# Altium PCB LED strip driver V3.PcbDoc
Units mm, origin at the board's own origin, x right, y up, seen from the top; angles counter-clockwise.
Board outline 41.35 x 36.82 mm, 2 copper layers (Top Layer, Bottom Layer); 45 components, 41 nets, 142 pads, 19 vias.
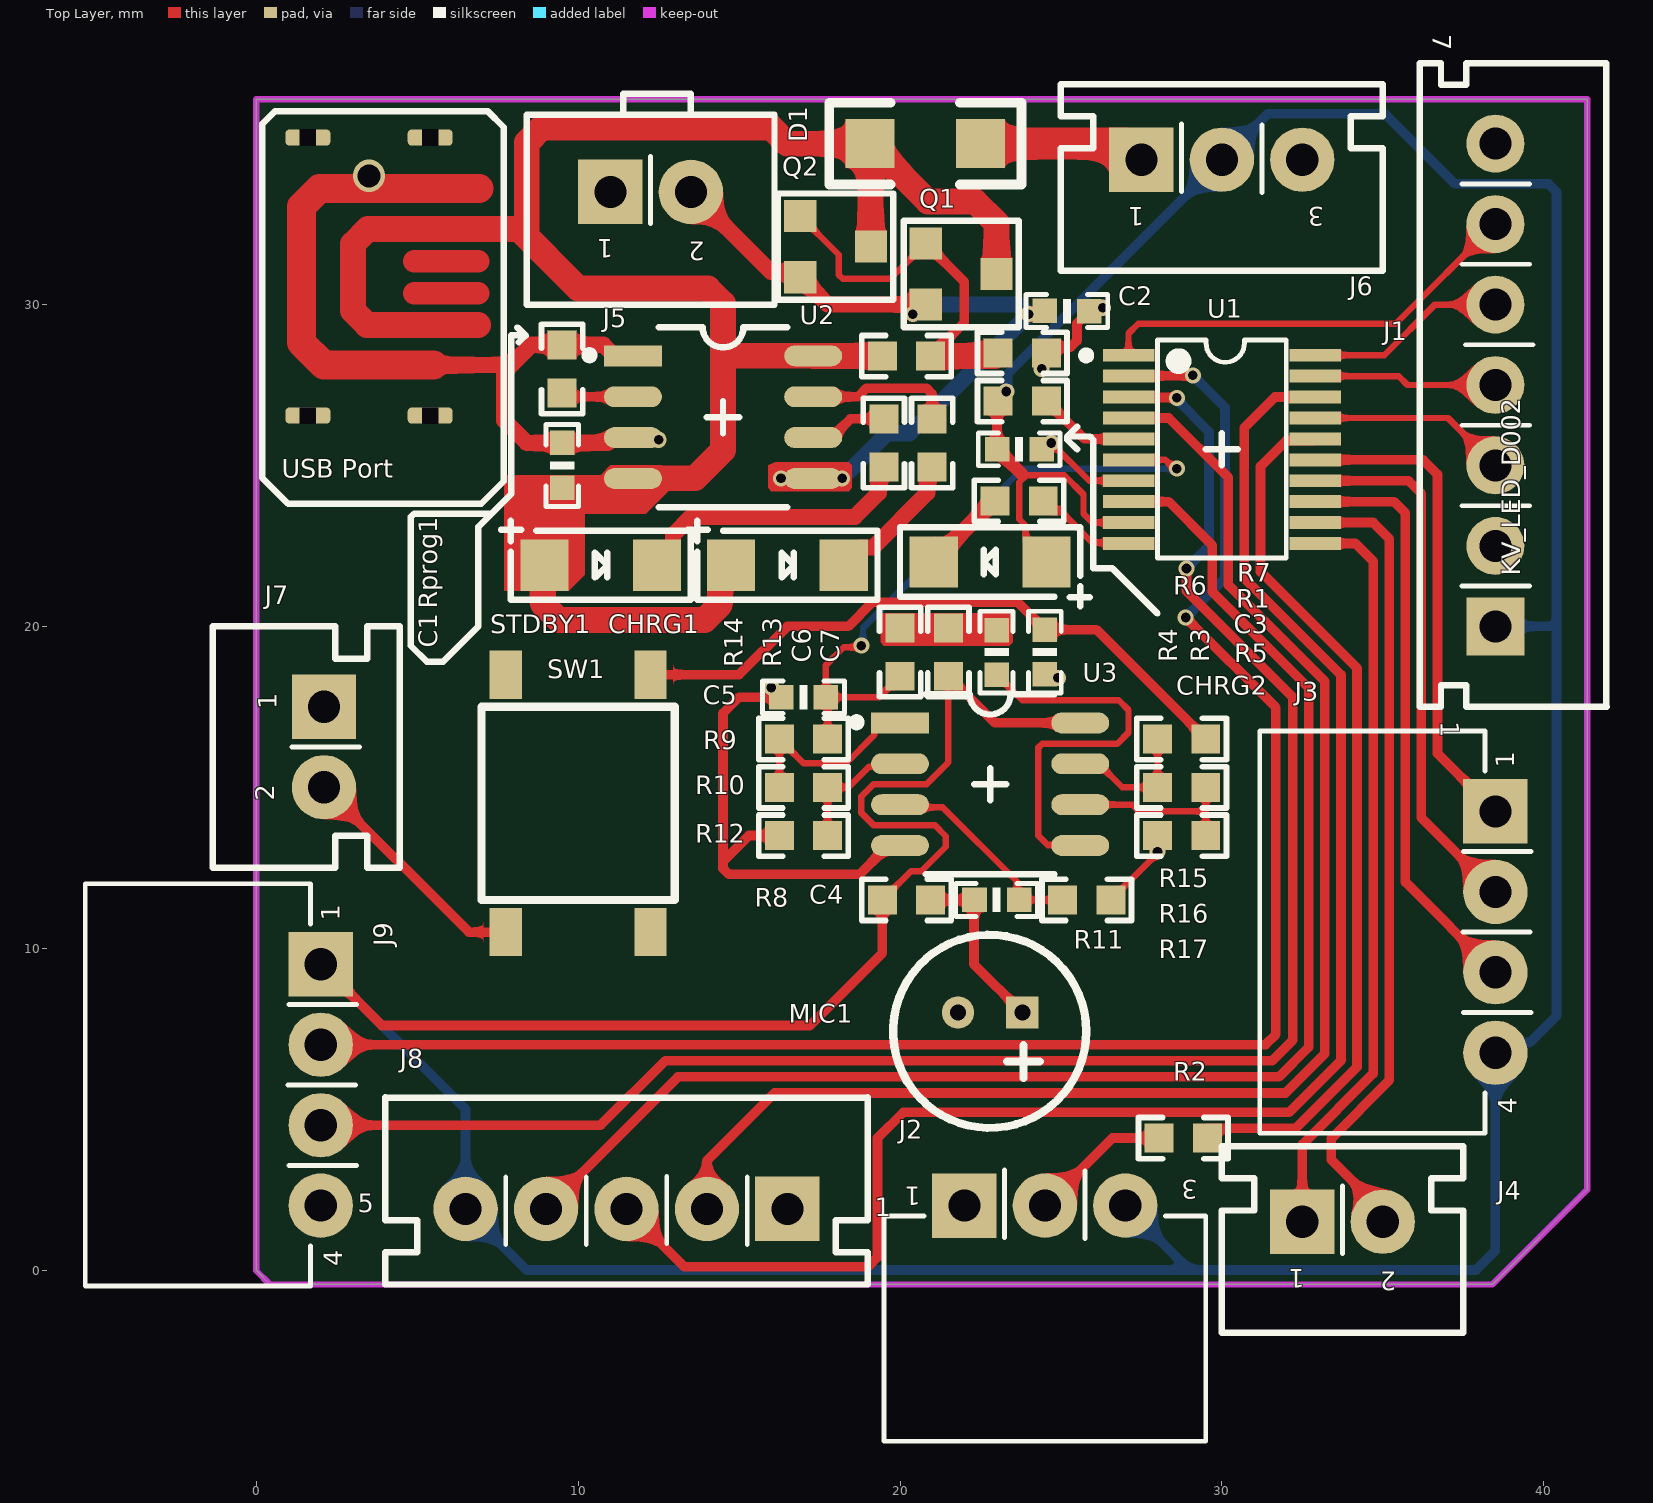
[diagram p0: Top Layer view]
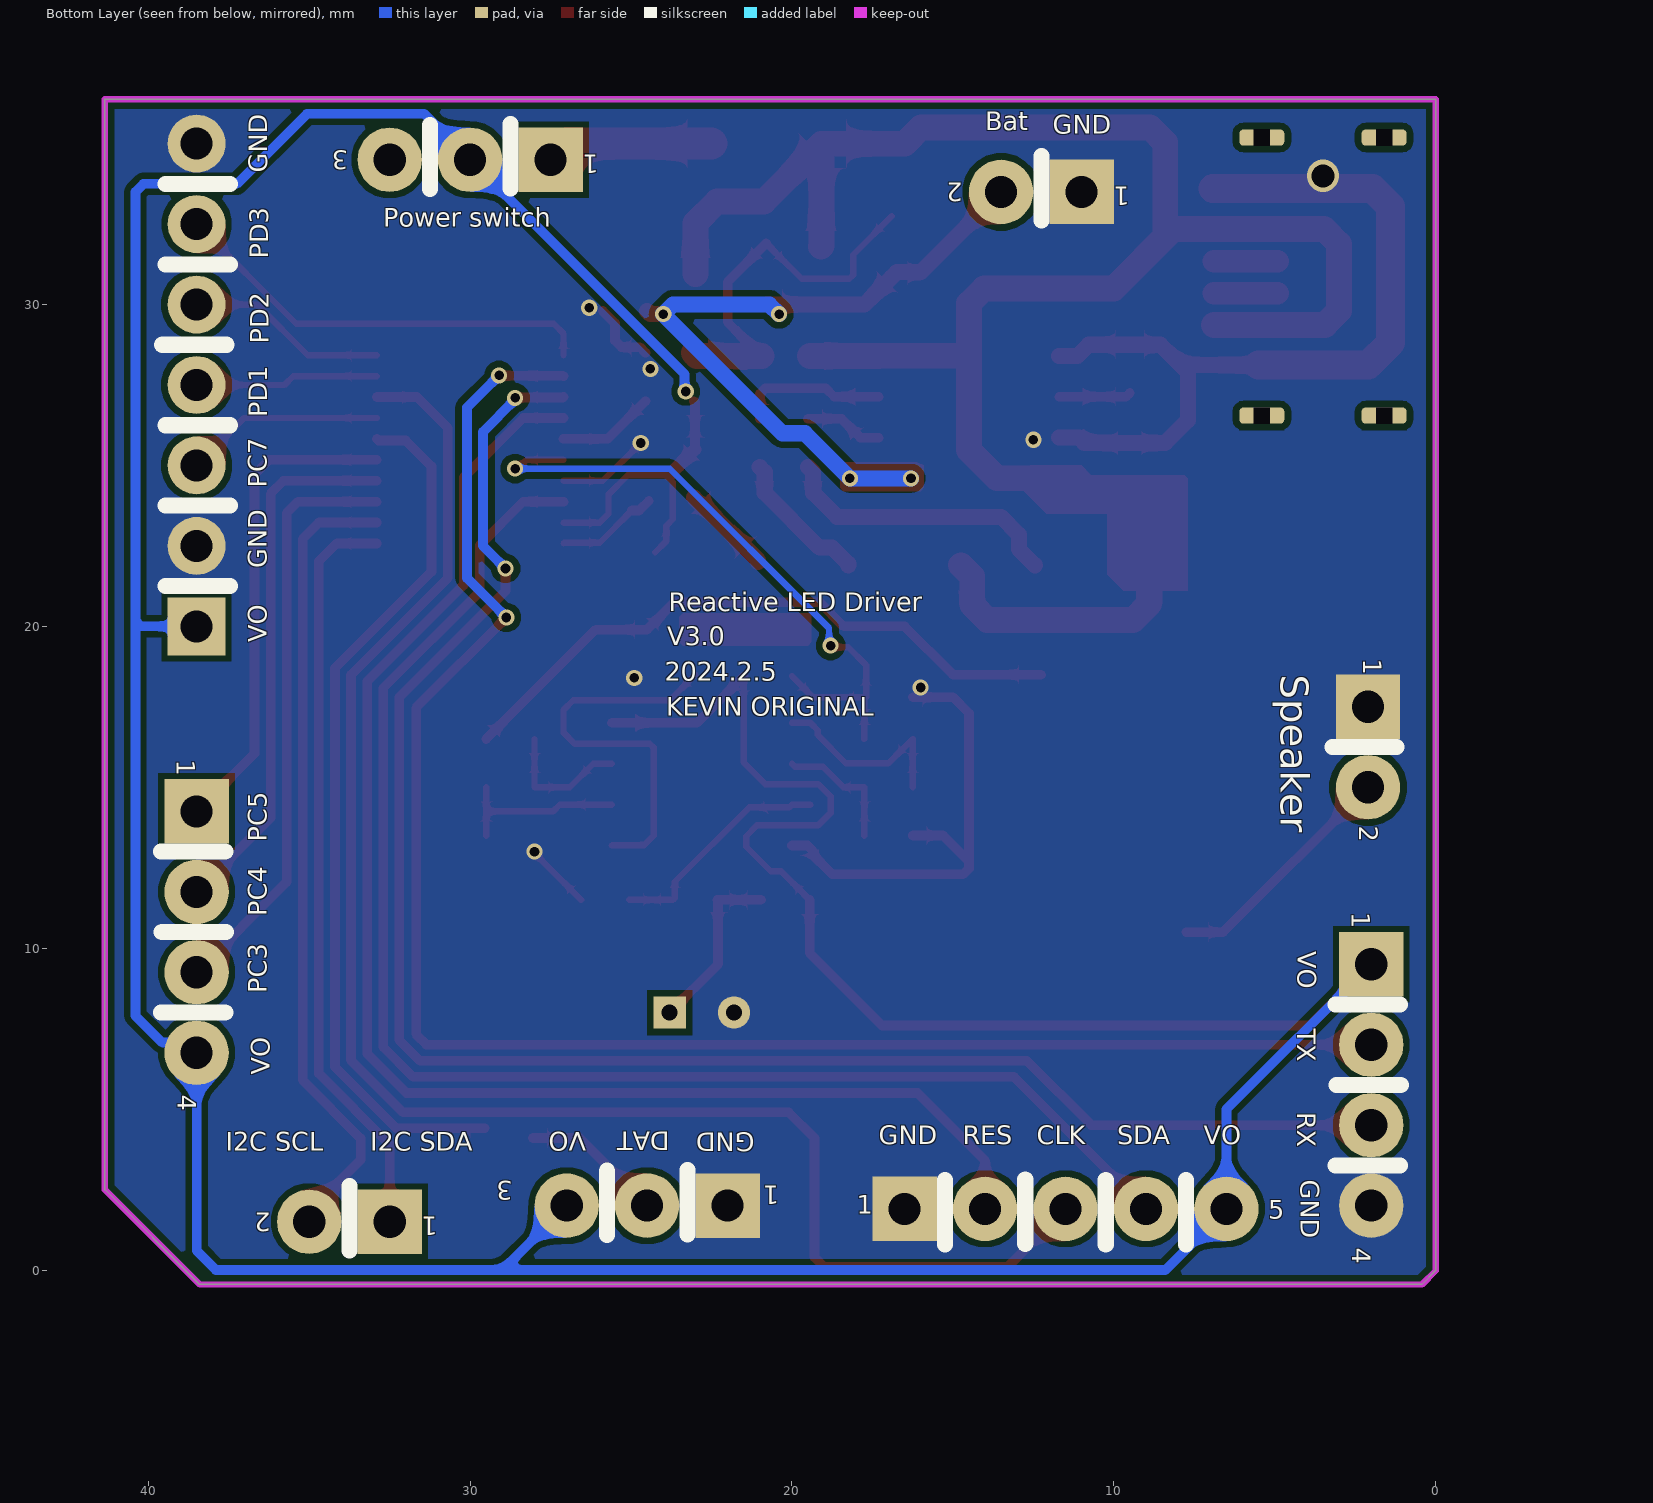
[diagram p1: Bottom Layer view, seen from below]
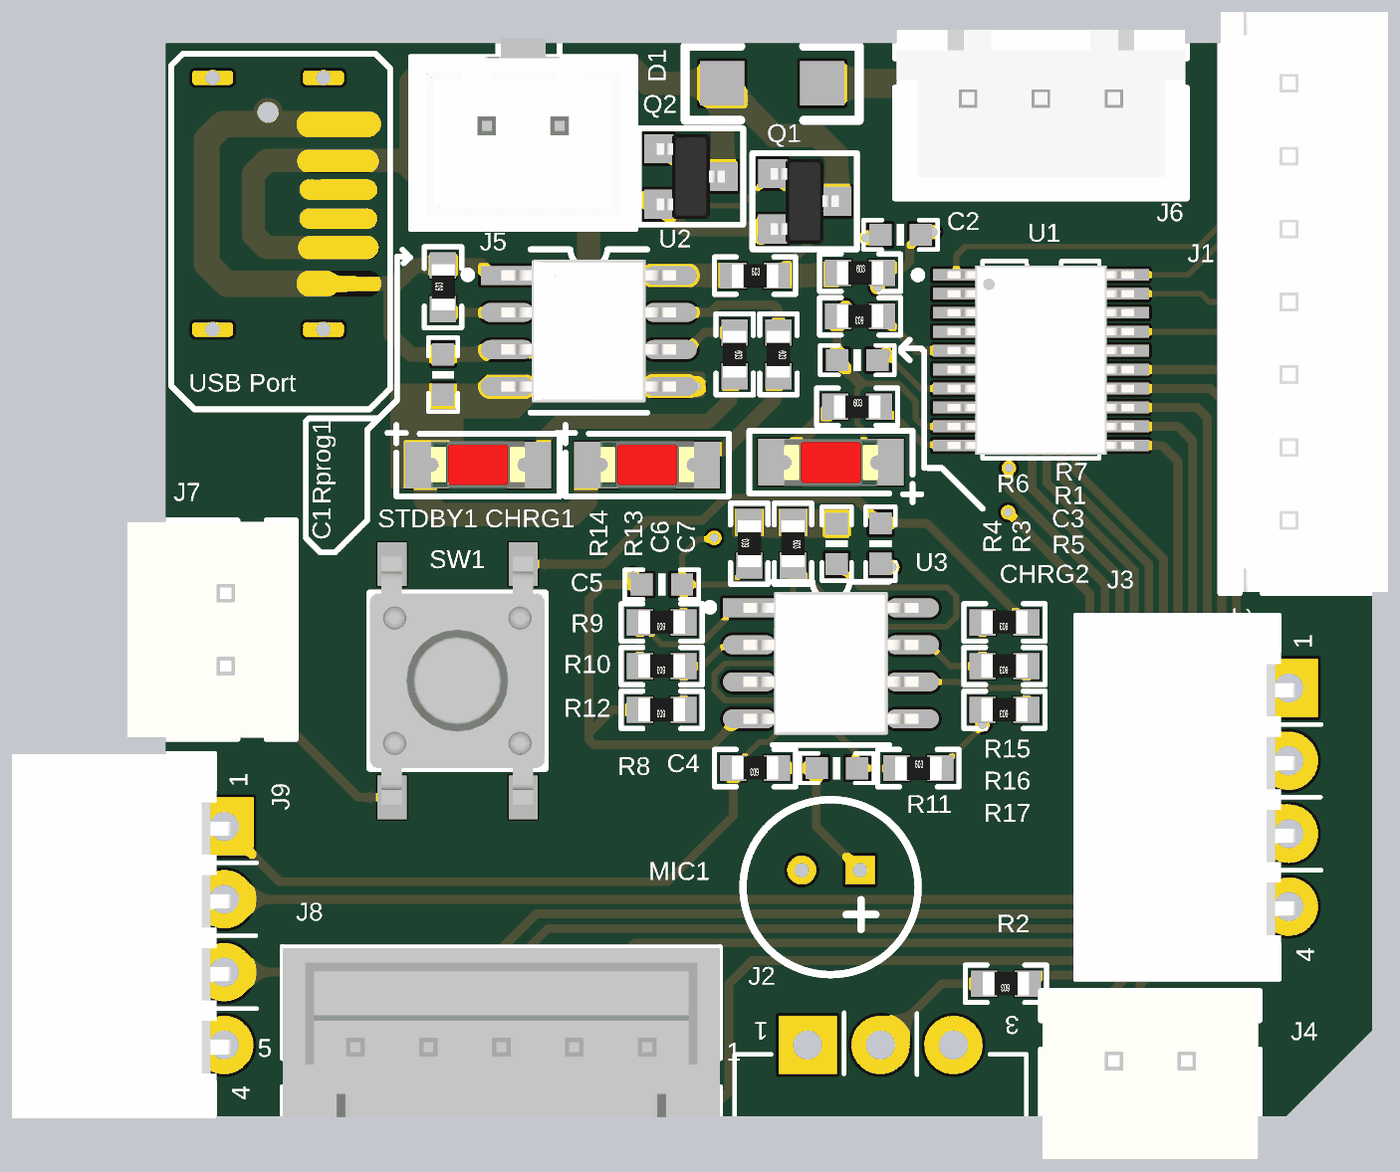
[diagram p2: 3D render of the assembled board from above, using the file's embedded part models]

## Layer stack, top to bottom
Top Solder: solder mask 0.0102, Solder Resist, Dk 3.5
Top Layer: signal copper 0.0356
Dielectric 1: dielectric 0.32, FR-4, Dk 4.8
Bottom Layer: signal copper 0.0356
Bottom Solder: solder mask 0.0102, Solder Resist, Dk 3.5

## Board outline
0.425,-0.45 0,-0.025 0,36.375 41.35,36.375 41.35,2.5 38.4,-0.45

## Design rules (kind name [scope] priority, off if disabled: settings)
Clearance [All] p1: gap=0.2 ignorepadtopadclearanceinfootprint=FALSE
PolygonConnect [All] p1: connectstyle=Direct reliefconductorwidth=0.254 reliefentries=4 polygonreliefangle="90 Angle" airgapwidth=0.254
RoutingVias [All] p1: holewidth=0.711 width=1.27 viastyle="Through Hole" minholewidth=0.711 minwidth=1.27 maxholewidth=0.711 maxwidth=1.27
SolderMaskExpansion [All] p1: expansion=0.102 istentingtop=FALSE
Width [All] p1: maxlimit=1 minlimit=0.1 preferedwidth=0.254
30 further rules are at their usual default settings.

## Components (designator, comment, footprint, x,y, rotation, side; value= is the part's Value field where it differs from the comment)
C1 "T542011037308" 0603P 9.5,25 r90 top value=10uF
C2 "T542011037308" 0603P 25.186,29.8 r0 top value=10uF
C3 "T542011037308" 0603P 23.7,25.5 r0 top value=4.7uF
C4 "T542011037308" 0603P 23,11.5 r0 top value=1uF
C5 "T542011037308" 0603P 17,17.8 r0 top value=10uF
C6 "T542011037308" 0603P 23,19.2 r270 top value=1uF
C7 "T542011037308" 0603P 24.5,19.2 r90 top value=10uF
CHRG1 "LED1206R_23-21\R6C-AM1N2AY\2A" LED1206-RED 16.5,21.9 r0 top
CHRG2 "LED1206R_23-21\R6C-AM1N2AY\2A" LED1206-RED 22.8,22 r180 top
D1 "T593000229100" 1206 19.071,35 r0 top
J1 "CCN250000-0107" "CONN 7P PH=2.5MM ST WAFER" 38.5,27.5 r270 top
J2 "CCN250000-0503" "CONN 3P PH=2.5mm HAA250A-3 90" 24.5,2 r180 top
J3 "CCN250010-0504" "CONN 4P PH=2.5mm RA WHITE HAA250A-4" 38.5,10.5 r90 top value=2.5mm
J4 "CCN250000-0102" "CONN 2P PH=2.5mm B2B-XH-A" 33.75,1.5 r180 top value=2.5mm
J5 "T690300125300" "CONN 2P PH=2.5mm HAA250A-2 WHITE" 12.25,33.5 r180 top value=2.5mm
J6 "CCN250000-0103" "CONN 3P PH=2.5mm B3B-XH-A" 30,34.5 r180 top value=2.5mm
J7 "CCN250000-0102" "CONN 2P PH=2.5mm B2B-XH-A" 2.1,16.25 r90 top value=2.5mm
J8 "T690300112400" "CONN 5P PH=2.5mm TJC3-5A-CS" 11.5,1.9 r0 top value=2.5mm
J9 "CCN250010-0504" "CONN 4P PH=2.5mm RA WHITE HAA250A-4" 2,5.75 r90 top value=2.5mm
MIC1 "MIC" MIC-6022 23.8,8 r180 top
Q1 "RCPA02907-0001" SOT23-132-RW 21.9,30.95 r270 top
Q2 "RCPA02907-0001" SOT23-132-RW 18,31.8 r270 top
R1 "QCF167240-1000" 0603-RW 23.8,27 r180 top value=200
R2 "QCF167240-1000" 0603-RW 28.8,4.1 r180 top value=33R
R3 "QCF167240-1000" 0603-RW 21,25.7 r270 top value=1k
R4 "QCF167240-1000" 0603-RW 19.5,25.7 r270 top value=1k
R5 "QCF167240-1000" 0603-RW 23.7,23.9 r0 top value=1k
R6 "QCF167240-1000" 0603-RW 20.2,28.4 r0 top value=5k
R7 "QCF167240-1000" 0603-RW 23.8,28.5 r0 top value=500k
R8 "QCF167240-1000" 0603-RW 20.2,11.5 r180 top value=5k
R9 "QCF167240-1000" 0603-RW 17,16.5 r180 top value=1k
R10 "QCF167240-1000" 0603-RW 17,15 r180 top value=100K
R11 "QCF167240-1000" 0603-RW 25.8,11.5 r0 top value=9.1K
R12 "QCF167240-1000" 0603-RW 17,13.5 r180 top value=1K
R13 "QCF167240-1000" 0603-RW 21.5,19.2 r270 top value=255k
R14 "QCF167240-1000" 0603-RW 20,19.2 r90 top value=1k
R15 "QCF167240-1000" 0603-RW 28.75,16.5 r180 top value=1k
R16 "QCF167240-1000" 0603-RW 28.75,15 r180 top value=51K
R17 "QCF167240-1000" 0603-RW 28.75,13.5 r180 top value=1k
Rprog1 "QCF167240-1000" 0603-RW 9.5,28 r90 top value=1.1k
STDBY1 "LED1206R_23-21\R6C-AM1N2AY\2A" LED1206-RED 10.7,21.9 r0 top
SW1 "T670200015100" "TACT SW TS-1102S-250H10.5" 10,14.5 r270 top value=TACT
U1 "RCI800336-0001" TSSOP20 30,25.5 r270 top
U2 "RCI240512-0001" SO8 14.5,26.5 r0 top
U3 "RCI000358-0001" SO8 22.8,15.095 r0 top

## Footprints (in the part's own frame and the unit in brackets; to place one, negate y for a bottom-side part, rotate by r counter-clockwise, add the part's x,y. Pads: shape width x height; smd on the part's side, far side on the other; paste and mask are expansions set on the pad)
0603-RW [mm]
  rect 0.9x0.9 smd mask+0.05: 1(-0.75,0) 2(0.75,0)
  silkscreen extent -1.39,-0.64 1.39,0.64, body extent -0.8,-0.41 0.8,0.39, height 0.3
0603P [mil]
  rect 30x30 smd: 1(-27,0) 2(27.5,-0.06)
  silkscreen extent -50,-20 50,20
1206 [mil]
  rect 60x60 smd: 1(0,0) 2(135,0)
  silkscreen extent -50,-50 185,50
"CONN 2P PH=2.5mm B2B-XH-A" [mm] "CONN 2P PH=2.5mm B2B-XH-A H7mm"
  rect 2x2 hole 1: 1(1.25,0)
  round 2 hole 1: 2(-1.25,0)
  silkscreen extent -3.75,-2.35 3.75,3.45, body extent -3.7,-2.32 3.7,3.43, height 7
"CONN 2P PH=2.5mm HAA250A-2 WHITE" [mm] "CONN 2P PH=2.5mm HAA250A-2 WHITE"
  rect 2x2 hole 1: 1(1.25,0)
  round 2 hole 1: 2(-1.25,0)
  silkscreen extent -3.85,-3.05 3.85,3.5, body extent -3.75,-3.05 3.75,3.5, height 7.4
"CONN 3P PH=2.5mm B3B-XH-A" [mm] "CONN 3P PH=2.5mm B3B-XH-A H7mm"
  rect 2x2 hole 1: 1(2.5,0)
  round 2 hole 1: 2(0,0) 3(-2.5,0)
  silkscreen extent -5,-2.35 5,3.45, body extent -4.95,-2.33 4.95,3.42, height 7
"CONN 3P PH=2.5mm HAA250A-3 90" [mm] "CONNECTOR 3PIN P=2.5 White 90'"
  rect 2x2 hole 1: 1(2.5,0)
  round 2 hole 1: 2(0,0) 3(-2.5,0)
  silkscreen extent -5,-1.11 5,7.32, body extent -5,-0.25 5,7.32, height 5.75
"CONN 4P PH=2.5mm RA WHITE HAA250A-4" [mm] "CONN 4P PH=2.5mm HAA250A-4 H5.8mm WHITE Color"
  rect 2x2 hole 1: 1(3.75,0)
  round 2 hole 1: 2(1.25,0) 3(-1.25,0) 4(-3.75,0)
  silkscreen extent -6.25,-1.11 6.25,7.32, body extent -6.28,-0.23 6.22,7.27, height 5.85
"CONN 5P PH=2.5mm TJC3-5A-CS" [mm] "CONN 5P PH=2.5mm TJC3-5A-CS"
  rect 2x2 hole 1: 1(5,0)
  round 2 hole 1: 2(2.5,0) 3(0,0) 4(-2.5,0) 5(-5,0)
  silkscreen extent -7.5,-2.35 7.5,3.47, body extent -7.5,-2.37 7.5,3.43, height 7.2
"CONN 7P PH=2.5MM ST WAFER" [mm] "WAFER 7PIN P=2.5mm 90' 单排"
  rect 1.8x1.8 hole 1: 1(7.5,0)
  round 1.8 hole 1: 2(5,0) 3(2.5,0) 4(0,0) 5(-2.5,0) 6(-5,0) 7(-7.5,0)
  silkscreen extent -10,-2.35 10,3.46, body extent -9.95,-2.35 9.95,3.4, height 7
LED1206-RED [mm]
  rect 1.5x1.6 smd mask+0.05: 1(-1.75,0) 2(1.75,0)
  silkscreen extent -3.1,-1.07 2.8,1.38, body extent -1.61,-0.79 1.61,0.81, height 1.1
MIC-6022 [mm]
  rect 1x1 hole 0.5: 1(0,0)
  round 1 hole 0.5: 2(2,0)
  silkscreen extent -1.99,-2.41 4.01,3.58
SO8 [mm] "SO8 8Pin Pitch 1.27mm Body 4.9mm X 3.9mm"
  rect 1.8x0.65 smd: 1(-2.8,1.905)
  oval 1.8x0.65 smd: 2(-2.8,0.635) 3(-2.8,-0.635) 4(-2.8,-1.905) 5(2.8,-1.905) 6(2.8,-0.635) 7(2.8,0.635) 8(2.8,1.905)
  silkscreen extent -4.25,-2.8 2,2.8, body extent -3,-2.45 3,2.45, height 1.75
SOT23-132-RW [mm]
  rect 1x1 smd: 1(-0.95,-1.1) 2(0.95,-1.1) 3(0,1.1)
  silkscreen extent -1.65,-1.79 1.65,1.79, body extent -1.46,-1.17 1.46,1.17, height 1
"TACT SW TS-1102S-250H10.5" [mm] "SMD TACT SWITCH 6*6*10.5mm TS-1102S-250H10.5"
  rect 1.5x1 smd mask+0.05: 1(-4,2.25) 2(4,2.25) 3(-4,-2.25) 4(4,-2.25)
  silkscreen extent -3,-3 3,3, body extent -4.25,-3.01 4.25,2.99, height 10.5
TSSOP20 [mm] "TSSOP,Exposed Paddle,0.65mm,pitch;20 pin,4.60mm W X 6.6mm L X 1.20mm H body"
  rect 0.4x1.6 smd: 1(-2.925,-2.9) 2(-2.275,-2.9) 3(-1.625,-2.9) 4(-0.975,-2.9) 5(-0.325,-2.9) 6(0.325,-2.9) 7(0.975,-2.9) 8(1.625,-2.9) 9(2.275,-2.9) 10(2.925,-2.9) 11(2.925,2.9) 12(2.275,2.9) 13(1.625,2.9) 14(0.975,2.9) 15(0.325,2.9) 16(-0.325,2.9) 17(-0.975,2.9) 18(-1.625,2.9) 19(-2.275,2.9) 20(-2.925,2.9)
  silkscreen extent -3.4,-4.32 3.37,2, body extent -3.25,-3.2 3.25,3.2, height 1.1

## Part data
C1 C2 C3 C4 C5 C6 C7: library part "CAP0402 0.01uF 16V 10%_X7R_WALSIN", "CAP X7R .01UF 16V +-10% 0402 WALSIN L", PACKAGE=CAPC0402, Tolerance=10%, Voltage=16V, CREATE_NAME=Nathan, CREATE_TIME=10-Jan-2020, Customer Specific=N/A, DIP&SMD=SMD, MFG=WALSIN, MFG Part=0402B103K160, Other=X7R, SAP=T542011037308, Type=Capacitor
CHRG1 CHRG2: "CHIP LED RED TYPE 1206", Color=Red, PACKAGE=1206, CREATE_NAME=Nathan, CREATE_TIME=18-Aug-2020, DIP&SMD=SMD, MFG=EVERLIGHT, MFG Part=23-21\R6C-AM1N2AY\2A, Type=LED
D1: library part PESD0603-240, "TVS 24VDC PESD0603-240 SMD LITTLE F K", Voltage=24VDC, CREATE_NAME=Nathan, CREATE_TIME=25-Mar-2019, Customer Specific=N/A, DIP&SMD=SMD, MFG="LITTLE FUSE", MFG Part=0.3A, SAP=T593000229100, Type=DIODE
J1: library part "CONN 7P PH=2.5mm B4B-XH-A ST", "GP CONNECTOR B4B-XH-A 7 PIN G", CREATE_NAME=Nathan, CREATE_TIME=24-Sep-2014, DIP&SMD=DIP, MFG=金瑞康, MFG Part=B4B-XH-A, SAP=T690300029200, Type=Connector
J2: library part "CONN 3P PH=2.5mm HAA250A-3 90", "CONNECTOR 3PIN P=2.5 White 90'", CREATE_NAME=TOM@Deftronics, CREATE_TIME=16-Apr-2014, DIP&SMD=DIP, MFG=金科基, SAP=T690300023700, Type=Connector
J3 J9: library part "CONN 4P PH=2.5mm  RA WHITE HAA250A-4", "CONN. 4P P=2.5mm 90' HAA250A-4 RA WHITE", Current=3A, DIP&SMD=DIP, MFG=金科基, MFG Part="HAA250A-4 WHITE", SAP=T690300038000, Type=Connector
J4 J7: library part "CONN 2P PH=2.5mm B2B-XH-A", "GP CONNECTOR B2B-XH-A 2 PIN G", Current=3A, DIP&SMD=DIP, MFG=金瑞康, MFG Part=HAA250A-2A-WHITE, SAP=T690300041200, Type=Connector, Vendor Code=10009989, Vendor Name=亿源电子有限公司
J5: library part "CONN 2P PH=2.5mm HAA250A-2 BLACK", "CONNECTOR HA2.5 2PIN BLACK K", Current=3A, CREATE_NAME=Nathan, CREATE_TIME=24-Nov-2017, DIP&SMD=DIP, MFG=金瑞康, MFG Part="HAA250A-2 BLACK", SAP=T690300125300, Type=Connector
J6: library part "CONN 3P PH=2.5mm B3B-XH-A", "GP CONNECTOR B3B-XH-A 3 PIN", Current=3A, DIP&SMD=DIP, SAP=T690300028900, Type=Connector, Vendor Code=10009989, Vendor Name=亿源电子有限公司
J8: library part "CONN 5P PH=2.5mm TJC3-5A-CS", "CONNECTOR 5PIN P:2.5MM WHITE M180 K", CREATE_NAME=Nathan, CREATE_TIME=18-July-2017, DIP&SMD=DIP, MFG="JIN JIA", MFG Part=TJC3-5A-CS, SAP=T690300112400, Type=Connector
Q1 Q2: library part LMBT2907ALT1G, "PNP CHIP TRANSISTOR PMBT2907 SOT-23", PACKAGE=SOT-23, Customer Specific=N/A, DIP&SMD=SMD, MFG=LRC, MFG Part=LMBT2907ALT1G, SAP=T582002610437, Type=PNP, Vendor Code=10009207, Vendor Name="MOBICON HOLDINGS LTD."
R1 R2 R3 R4 R5 R6 R7 R8 R9 R10 R11 R12 R13 R14 R15 R16 R17 Rprog1: library part "RES0402 1/16W 0.1% 100 OHM", "CHIP RES 100 OHM 1/16W 0.1% 0402", PACKAGE=0402, Power=1/16W, CREATE_NAME=TOM@Deftronics, CREATE_TIME=05-Jun-2014, Customer Specific=N/A, DIP&SMD=SMD, SAP=T501100001129, Type=Resistor
STDBY1: "CHIP LED RED TYPE 1206", Color=Blue, PACKAGE=1206, CREATE_NAME=Nathan, CREATE_TIME=18-Aug-2020, DIP&SMD=SMD, MFG=EVERLIGHT, MFG Part=23-21\R6C-AM1N2AY\2A, Type=LED
SW1: library part "TACT SW TS-1102S-250H10.5", "TACT SW TS-1102S-250H10.5 JINGJU K", Current=50mA, Voltage=12V, CREATE_NAME=Nathan, CREATE_TIME=05-July-2019, Customer Specific=N/A, DIP&SMD=SMD, MFG=JINGJU, MFG Part=TS-1102S-250H10.5, SAP=T670200015100, Type=Switch
U1: library part N76E003, "IC MCU 20P TSSOP20", CREATE_NAME=GordonL@Deftronics, CREATE_TIME=23-Mar-2014, Customer Specific=N/A, DIP&SMD=SMD, MFG=ST, MFG Part=STM8S003F3P6, SAP=T610300083725, Type=IC
U2: library part 24LC512, "IC 8P 24LC512T-I/SN  SO-8", Customer Specific=N/A, DIP&SMD=SMD, MFG=MICROCHIP, MFG Part=TP4056, SAP=T610100064201, Type=IC, Vendor Code=10020271, Vendor Name="MICROCHIP TECHNOLOGY IRELAND LTD"
U3: library part LM358AM, "IC OP-AMP Dual LM358 DUAL OP-AMP SOIC8", Customer Specific=N/A, DIP&SMD=SMD, MFG="National SEMI", MFG Part=LM358AM, SAP=T610500008001, Type="IC AMP", Vendor Code=10020355, Vendor Name="SERIAL MICROELECTRONICS (HK) LIMITE"

## Free pads (board coordinates)
  rrect50% 1.4x0.5 hole 0.5 square: 3(1.6,26.55) 3(1.6,35.19) 3(5.4,26.55) 3(5.4,35.19)

## Via types
v1: diameter 0.5, hole 0.3, Top Layer to Bottom Layer, 18 vias
v2: diameter 1, hole 0.711, Top Layer to Bottom Layer, tented both sides, 1 vias

## Nets (pads, with @x,y where several pads share a name; then routed paths per layer and width w, separated by ;. In a path a pad name is that pad's centre, name@x,y a point inside that pad or via, vN(x,y) a via of type N, cw(c..) or ccw(c..) an arc to the next point about the centre after c; other vN are vias at no path point)
GND: C1.2 C2.2 C3.2 C5.1 C7.1 J1.2 J1.7 J2.1 J5.1 J7.1 J8.1 J9.4 MIC1.2 R7.2 R11.2 R12.2 R17.2 Rprog1.2 U1.7 U2.1 U2.3 U3.4 | length 49.2
  Top Layer w0.2: v1(24.7,25.7) 25.875,24.525 U1.7 ; R11.2 28,12.95 v1(28,13)
  Top Layer w0.3: C5.1@16.239,17.8 15,17.8 14.5,17.3 14.5,12.7 ; R12.2 15.3,13.5 14.5,12.7 ; U3.4 19.52,13.19 19.358,13.028 19.358,12.908 18.75,12.3 14.676,12.3 14.5,12.476 14.5,12.7 ; R7.2 24.726,28.676 25.3,28.676 25.5,28.876 25.5,29.414 C2.2
  Top Layer w0.5: 5.5,28.12 7.92,28.12 ; U2.3 11.084,25.865 10.918,25.699 C1.2 8.401,25.699 7.7,26.4 7.7,27.9 7.92,28.12 ; U2.1 11.125,28.405 10.78,28.75 Rprog1.2 8.55,28.75 7.92,28.12
  Top Layer w0.9: 5.5,28.12 2.093,28.12 1.395,28.817 1.395,33.04 1.955,33.6 6.925,33.6
  other v1: 16,18.1 24.9,18.4 12.5,25.8 24.4,28 26.3,29.9
  other v2: 3.5,34
I2C_SCL: J4.2 U1.12 | length 25.1
  Top Layer w0.3: U1.12 34.699,23.225 35.2,22.724 35.2,5.893 33.4,4.093 33.4,3.426 35,1.826 J4.2
I2C_SDA: J4.1 U1.11 | length 23.5
  Top Layer w0.3: J4.1 32.5,3.9 34.7,6.1 34.7,22.024 34.15,22.574 U1.11@32.901,22.574
NetC4_1: C4.1 MIC1.1 R8.1 | length 5.5
  Top Layer w0.3: R8.1 C4.1@22.3,11.5 ; C4.1 C4.1@22.3,11.5 ; MIC1.1 22.3,9.5 C4.1@22.3,11.5
NetC4_2: C4.2 R11.1 U3.3 | length 7.1
  Top Layer w0.2: U3.3@19.425,14.46 U3.3 20.086,14.374 21.326,14.374 23.638,12.062 23.638,11.559 C4.2 23.7,11.5 R11.1
NetC6_1: C6.1 R13.1 R14.2
NetC6_2: C6.2 U3.5 | length 12.4
  Top Layer w0.2: C6.2 23.8,17.7 26.8,17.7 27.1,17.4 27.1,16.7 26.755,16.355 24.417,16.355 24.3,16.238 24.3,13.495 24.595,13.2 25.59,13.2 U3.5
NetC7_2: C7.2 R15.1 SW1.1 | length 19.9
  Top Layer w0.3: SW1.1 15,18.5 16.5,20 18.395,20 19.145,20.75 23.65,20.75 C7.2 26.101,19.898 R15.1
NetCHRG1_2: CHRG1.2 R3.2 | length 4.4
  Top Layer w0.5: CHRG1.2 18.25,21.95 18.75,22.45 19.15,22.45 20.845,24.145 20.845,24.795 R3.2
NetCHRG2_2: CHRG2.2 R5.1 | length 2.9
  Top Layer w0.5: CHRG2.2 21.05,22.05 22.8,23.8 22.85,23.8 R5.1@23.05,24
NetD1_2: D1.2 J6.1 | length 5.2
  Top Layer w1: D1.2 27,35 J6.1
NetJ1_3: J1.3 U1.17 | length 6.2
  Top Layer w0.2: U1.17 37.025,26.475 J1.3
NetJ1_4: J1.4 U1.19 | length 5.7
  Top Layer w0.2: U1.19 35.493,27.775 35.768,27.5 J1.4
NetJ1_5: J1.5 U1.20 | length 6.3
  Top Layer w0.2: U1.20 35.046,28.425 36.621,30 J1.5
NetJ1_6: J1.6 U1.1 | length 13.5
  Top Layer w0.2: U1.1 27.1,29.1 27.4,29.4 35.4,29.4 J1.6
NetJ3_1: J3.1 U1.15 | length 15.2
  Top Layer w0.3: U1.15 36.249,25.175 36.7,24.724 36.7,16.05 J3.1
NetJ3_2: J3.2 U1.14 | length 16.8
  Top Layer w0.3: U1.14 35.799,24.525 36.2,24.124 36.2,14.05 J3.2
NetJ3_3: J3.3 U1.13 | length 18.4
  Top Layer w0.3: U1.13 35.349,23.875 35.7,23.524 35.7,12.05 J3.3
NetQ1_1: Q1.1 Q2.1 R6.2 R7.1 | length 12.1
  Top Layer w0.2: Q2.1 18.1,31.55 18.1,30.917 18.217,30.8 19.7,30.8 20.4,31.5 Q1.1
  Top Layer w0.3: Q1.1 22,30.7 22,29.45 R6.2
  Top Layer w0.8: R6.2 22.95,28.4 R7.1
NetR1_1: R1.1 U1.5 | length 3
  Top Layer w0.3: R1.1 25.725,25.825 U1.5
NetR2_1: R2.1 U1.16 | length 27.4
  Top Layer w0.3: R2.1@29.55,4.4 32.293,4.4 34.2,6.307 34.2,18.7 31.2,21.7 31.2,22.7 31.2,24.97 32.005,25.775 32.85,25.775 U1.16
NetR3_1: R3.1 U2.7 | length 4.7
  Top Layer w0.3: U2.7 18.686,27.135 18.951,27.4 20.824,27.4 21,27.224 R3.1
NetR4_1: R4.1 U2.6 | length 2.4
  Top Layer w0.3: U2.6 17.875,25.865 18.46,26.45 R4.1
NetR4_2: R4.2 STDBY1.2 | length 9
  Top Layer w0.5: STDBY1.2 12.95,22.4 12.95,22.85 13.5,23.4 18.6,23.4 19.345,24.145 19.345,24.795 R4.2
NetR5_2: R5.2 U1.10 | length 3.2
  Top Layer w0.2: 24.976,23.6 25.976,22.6 27.075,22.6 U1.10
  Top Layer w0.3: R5.2 24.75,23.6 24.976,23.6
NetR9_2: R9.2 R10.2 U3.1 | length 6.2
  Top Layer w0.2: R10.2 R9.2 17,15.75 17.176,15.75 18.324,15.75 19.2,16.626 19.2,16.775 19.425,17 U3.1
NetR10_1: R10.1 R12.1 U3.2 | length 4.1
  Top Layer w0.2: R12.1 R10.1 18.4,15 19.044,15.644 19.914,15.644 U3.2
NetR15_2: R15.2 R16.2 U3.7 | length 4.2
  Top Layer w0.2: U3.7 26.175,15.73 26.905,15 R16.2 R15.2
NetR16_1: R16.1 R17.1 U3.6 | length 5.5
  Top Layer w0.2: U3.6 27.216,14.46 27.426,14.25 28.574,14.25 29.5,14.25 ; R17.1 29.5,14.25 ; R16.1 29.5,14.25
NetRprog1_1: Rprog1.1 U2.2 | length 2.2
  Top Layer w0.3: Rprog1.1 9.615,27.135 U2.2
RST: J8.2 U1.4 | length 45.1
  Top Layer w0.3: J8.2 14,3.4 16.1,5.5 31.979,5.5 33.2,6.721 33.2,18.286 30.2,21.286 30.2,24.625 28.35,26.475 U1.4
RX: J9.3 U1.3 | length 54.8
  Top Layer w0.3: J9.3 10.7,4.5 12.7,6.5 31.564,6.5 32.2,7.136 32.2,17.8 28.9,21.1 v1(28.9,21.8) ; U1.3 27.113,27.112 28.588,27.112 v1(28.6,27.1)
  Bottom Layer w0.3: v1(28.6,27.1) 28.6,27.046 29.6,26.046 29.6,22.5 v1(28.9,21.8)
SCL: J8.3 U1.18 | length 51.3
  Top Layer w0.3: J8.3 13.3,0.1 19,0.1 19.3,0.4 19.3,4.1 20.1,4.9 32.086,4.9 33.7,6.514 33.7,18.493 30.7,21.493 30.7,26.175 31.65,27.125 U1.18
SDA: J8.4 U1.8 | length 45.8
  Top Layer w0.3: J8.4 13.1,6 31.772,6 32.7,6.928 32.7,18.079 29.7,21.079 29.7,22.525 28.35,23.875 U1.8
Sound_sig: C5.2 R9.1 R14.1 U1.6 | length 20.2
  Top Layer w0.2: R9.1 17.75,17.747 C5.2 ; v1(18.8,19.4) 18.75,19.35 18.25,19.35 17.698,18.798 C5.2 ; R14.1 19.348,17.798 C5.2 ; U1.6 28.244,25.175 28.519,24.9 v1(28.6,24.9)
  Bottom Layer w0.2: v1(18.8,19.4) 18.85,19.45 18.85,19.95 23.8,24.9 v1(28.6,24.9)
SpeakerP: J7.2 SW1.4 | length 7.5
  Top Layer w0.3: J7.2 6.6,10.5 SW1.4
TX: J9.2 U1.2 | length 54.4
  Top Layer w0.3: J9.2 31.357,7 31.679,7.321 31.679,17.473 v1(28.876,20.276) ; U1.2 27.113,27.787 29.087,27.787 v1(29.1,27.8)
  Bottom Layer w0.3: v1(28.876,20.276) 30.1,21.5 30.1,26.8 v1(29.1,27.8)
V_bat: C2.1 J5.2 Q1.2 Q2.2 U2.5 | length 23
  Top Layer w0.5: J5.2 15.995,31.005 16.745,31.005 Q2.2 17.75,30 Q1.2 ; v1(24,29.7) 24.4,29.7 C2.1
  Bottom Layer w0.5: v1(16.3,24.6) v1(18.2,24.6) 19.6,26 20.3,26 v1(24,29.7) 23.7,30 20.7,30 v1(20.4,29.7)
V_O: C3.1 CHRG2.1 J1.1 J2.3 J3.4 J6.2 J8.5 J9.1 R1.2 R8.2 R13.2 U1.9 U3.8 | length 150.6
  Top Layer w0.2: R8.2 20.341,12.391 20.659,12.391 21.417,13.148 21.417,13.483 21.075,13.825 19.176,13.825 18.8,14.201 18.8,14.719 19.176,15.095 20.824,15.095 21.5,15.771 R13.2 ; CHRG2.1@24.25,22.3 23.9,22.65 23.9,23.126 23.7,23.326 23.7,24.474 23.9,24.674 23.9,24.7 25.1,24.7 25.7,24.1 25.7,23.5 25.975,23.225 U1.9
  Top Layer w0.3: J9.1 3.9,7.6 17.2,7.6 19.45,9.85 R8.2 ; R13.2 22.95,17 U3.8 ; C3.1 23.014,26.964 R1.2
  Top Layer w0.4: C3.1 23.795,24.72
  Bottom Layer w0.3: J9.1 6.5,5 J8.5 8.4,0 29,0 ; v1(23.3,27.3) 23.338,27.338 23.338,27.838 J6.2 31.425,35.925 35.075,35.925 37.25,33.75 40.15,33.75 40.4,33.5 40.4,20.176 ; J2.3 29,0 ; J1.1 40.224,20 40.4,20.176 ; 29,0 37.9,0 38.5,0.6 J3.4 38.825,7.075 39.575,7.075 40.4,7.9 40.4,20.176
VBUS: C1.1 CHRG1.1 D1.1 Q1.3 Q2.3 R6.1 STDBY1.1 U2.4 U2.8 | length 63.2
  Top Layer w0.8: 6.895,29.367 3.439,29.367 3,29.806 3,31.881 3.469,32.35 8.15,32.35 10,30.5 14.031,30.5 14.5,30.031 14.5,28.5 ; 8.4,32.1 8.4,35.031 8.869,35.5 16,35.5 16.5,35 D1.1 D1.1@19.086,34.986 ; STDBY1.1 8.9,21.85 8.9,20.7 9.4,20.2 13.931,20.2 14.4,20.669 14.4,21.55 CHRG1.1 ; U2.4@12.2,24.6 13.631,24.6 14.5,25.469 14.5,28.5 ; Q2.3 19.086,31.814 D1.1@19.086,34.986 ; R6.1 19.447,28.402 17.303,28.402 U2.8 14.595,28.405 14.5,28.5 ; Q1.3 23,32.531 22.331,33.2 20.871,33.2 D1.1@19.086,34.986
WS_DI: J2.2 R2.2 | length 4.4
  Top Layer w0.3: J2.2 26.6,4.1 R2.2
pads on no net: J6.3 SW1.2 SW1.3
copper on no net: | length 4
  Top Layer w0.7: 4.9,30.35 6.9,30.35 ; 4.9,31.35 6.9,31.35

## Polygon pours and split planes (outlines as drawn)
GND on Bottom Layer "GND_L02_P001" (solid, pour order 1): 0,36.375 0.212,36.163 0.212,-0.238 38.188,-0.238 38.4,-0.45 41.35,2.5 41.35,36.35 41.2,36.5

## Keep-outs
Keep-Out Layer:
  the board outline again, w0.2

## Other copper
Top Layer:
  region net NetC6_1: 23.4,20.4 23.5,20.3 23.5,19.5 23.4,19.4 19.5,19.4 19.4,19.5 19.4,20.4
  region net V_bat: 16.1,25.1 18.4,25.1 18.5,25 18.5,24.3 18.4,24.2 16,24.2 15.9,24.3 15.9,25
  region net VBUS: 7.7,21.1 7.7,24.6 7.8,24.7 10.7,24.7 11,25 12.6,25 12.8,24.8 12.8,24.2 12.1,23.5 10.2,23.5 10.2,21.6 9.7,21.1

## Silkscreen, mask and mechanical layers (free items; w line width, h text height)
Top Overlay:
  lines w0.2: 7.3,23.5 4.9,23.5 4.8,23.4 4.8,19.4 5.3,18.9 5.8,18.9 6.9,20 6.9,23.1 7.925,24.125 7.925,24.2 7.925,29.05 8.325,29.05 8.325,29 8.15,28.825 ; 8.113,29.288 8.375,29.025 ; 25.5,25.5 25.2,25.8 25.2,25.9 ; 25.5,26.2 25.2,25.9 ; 26,21.8 26,25.8 25.9,25.9 25.2,25.9 ; 26.1,21.8 26.6,21.8 28,20.4 ; 0.184,24.612 0.184,35.612 0.584,36.012 7.184,36.012 7.684,35.512 7.684,24.512 6.984,23.812 0.984,23.812 0.184,24.612
  text "USB Port" at 0.784,24.422 h1
  text "KV_LED_D002" at 39.48,21.576 h1 r90
Bottom Overlay:
  text "Bat" at 14,35.211 h1
  text "GND" at 11.9,35.111 h1
  text "GND" at 36.097,34.1 h1 r270
  text "Power switch" at 32.7,32.211 h1
  text "PD3" at 36.072,31.425 h1 r270
  text "PD2" at 36.05,28.775 h1 r270
  text "PD1" at 36.1,26.5 h1 r270
  text "PC7" at 36.111,24.3 h1 r270
  text "GND" at 36.111,21.8 h1 r270
  text "Reactive LED Driver" at 23.821,20.262 h1
  text "VO" at 36.111,19.5 h1 r270
  text "V3.0" at 23.87,19.214 h1
  text "Speaker" at 5.11,18.5 h1.5 r90
  text "2024.2.5" at 23.953,18.112 h1
  text "KEVIN ORIGINAL" at 23.9,17.014 h1
  text "PC5" at 36.111,13.3 h1 r270
  text "PC4" at 36.111,11 h1 r270
  text "VO" at 4.489,9.9 h1 r90
  text "PC3" at 36.111,8.6 h1 r270
  text "TX" at 4.5,7.5 h1 r90
  text "VO" at 36.019,6.066 h1 r270
  text "RX" at 4.5,4.9 h1 r90
  text "DAT" at 23.8,4.5 h1 r180
  text "VO" at 26.4,4.489 h1 r180
  text "GND" at 21.15,4.464 h1 r180
  text "VO" at 7.2,3.711 h1
  text "SDA" at 9.9,3.711 h1
  text "CLK" at 12.4,3.711 h1
  text "RES" at 14.7,3.711 h1
  text "GND" at 17.3,3.711 h1
  text "I2C SDA" at 33.1,3.511 h1
  text "I2C SCL" at 37.6,3.511 h1
  text "GND" at 4.389,2.8 h1 r90
Top Solder:
  lines w0.7: 4.93,30.358 6.93,30.358 ; 4.93,31.358 6.93,31.358
  lines w0.8: 4.9,32.325 6.9,32.325 ; 4.93,29.358 6.93,29.358
  lines w0.9: 4.93,28.128 6.93,28.128 ; 4.93,33.588 6.93,33.588

## Text inside footprints (layer, text, board x,y; h text height)
J1: Top Overlay "1" at 36.6,17.05 h1 r270; Top Overlay "7" at 36.35,38.4 h1 r270
J2: Bottom Overlay "1" at 20.391,2.813 h1 r180; Bottom Overlay "3" at 28.671,2.965 h1 r180; Top Overlay "1" at 20.645,2.787 h1 r180; Top Overlay "3" at 29.255,2.991 h1 r180
J3: Bottom Overlay "1" at 39.313,15.859 h1 r90; Bottom Overlay "4" at 39.287,5.445 h1 r90; Top Overlay "1" at 39.287,15.605 h1 r90; Top Overlay "4" at 39.364,4.861 h1 r90
J4: Bottom Overlay "2" at 36.188,1.983 h1 r180; Bottom Overlay "1" at 31.007,1.856 h1 r180; Top Overlay "2" at 35.426,0.154 h1 r180; Top Overlay "1" at 32.582,0.23 h1 r180
J5: Bottom Overlay "1" at 9.507,33.856 h1 r180; Bottom Overlay "2" at 14.688,33.983 h1 r180; Top Overlay "1" at 11.082,32.23 h1 r180; Top Overlay "2" at 13.926,32.154 h1 r180
J6: Bottom Overlay "1" at 26.007,34.856 h1 r180; Bottom Overlay "3" at 33.785,34.983 h1 r180; Top Overlay "1" at 27.582,33.23 h1 r180; Top Overlay "3" at 33.175,33.23 h1 r180
J7: Bottom Overlay "2" at 2.583,13.812 h1 r90; Bottom Overlay "1" at 2.456,18.993 h1 r90; Top Overlay "2" at 0.754,14.574 h1 r90; Top Overlay "1" at 0.83,17.418 h1 r90
J8: Bottom Overlay "5" at 5.201,1.392 h1; Bottom Overlay "1" at 17.993,1.544 h1; Top Overlay "5" at 3.143,1.595 h1; Top Overlay "1" at 19.222,1.468 h1
J9: Bottom Overlay "1" at 2.813,11.109 h1 r90; Bottom Overlay "4" at 2.787,0.695 h1 r90; Top Overlay "1" at 2.787,10.855 h1 r90; Top Overlay "4" at 2.864,0.111 h1 r90